# Altium PCB I2C ADC shield.PcbDoc
Units mil, origin at the board's own origin, x right, y up, seen from the top; angles counter-clockwise.
Board outline 3937.01 x 2755.91 mil, 2 copper layers (Top Layer, Bottom Layer); 18 components, 41 nets, 93 pads, 0 vias.
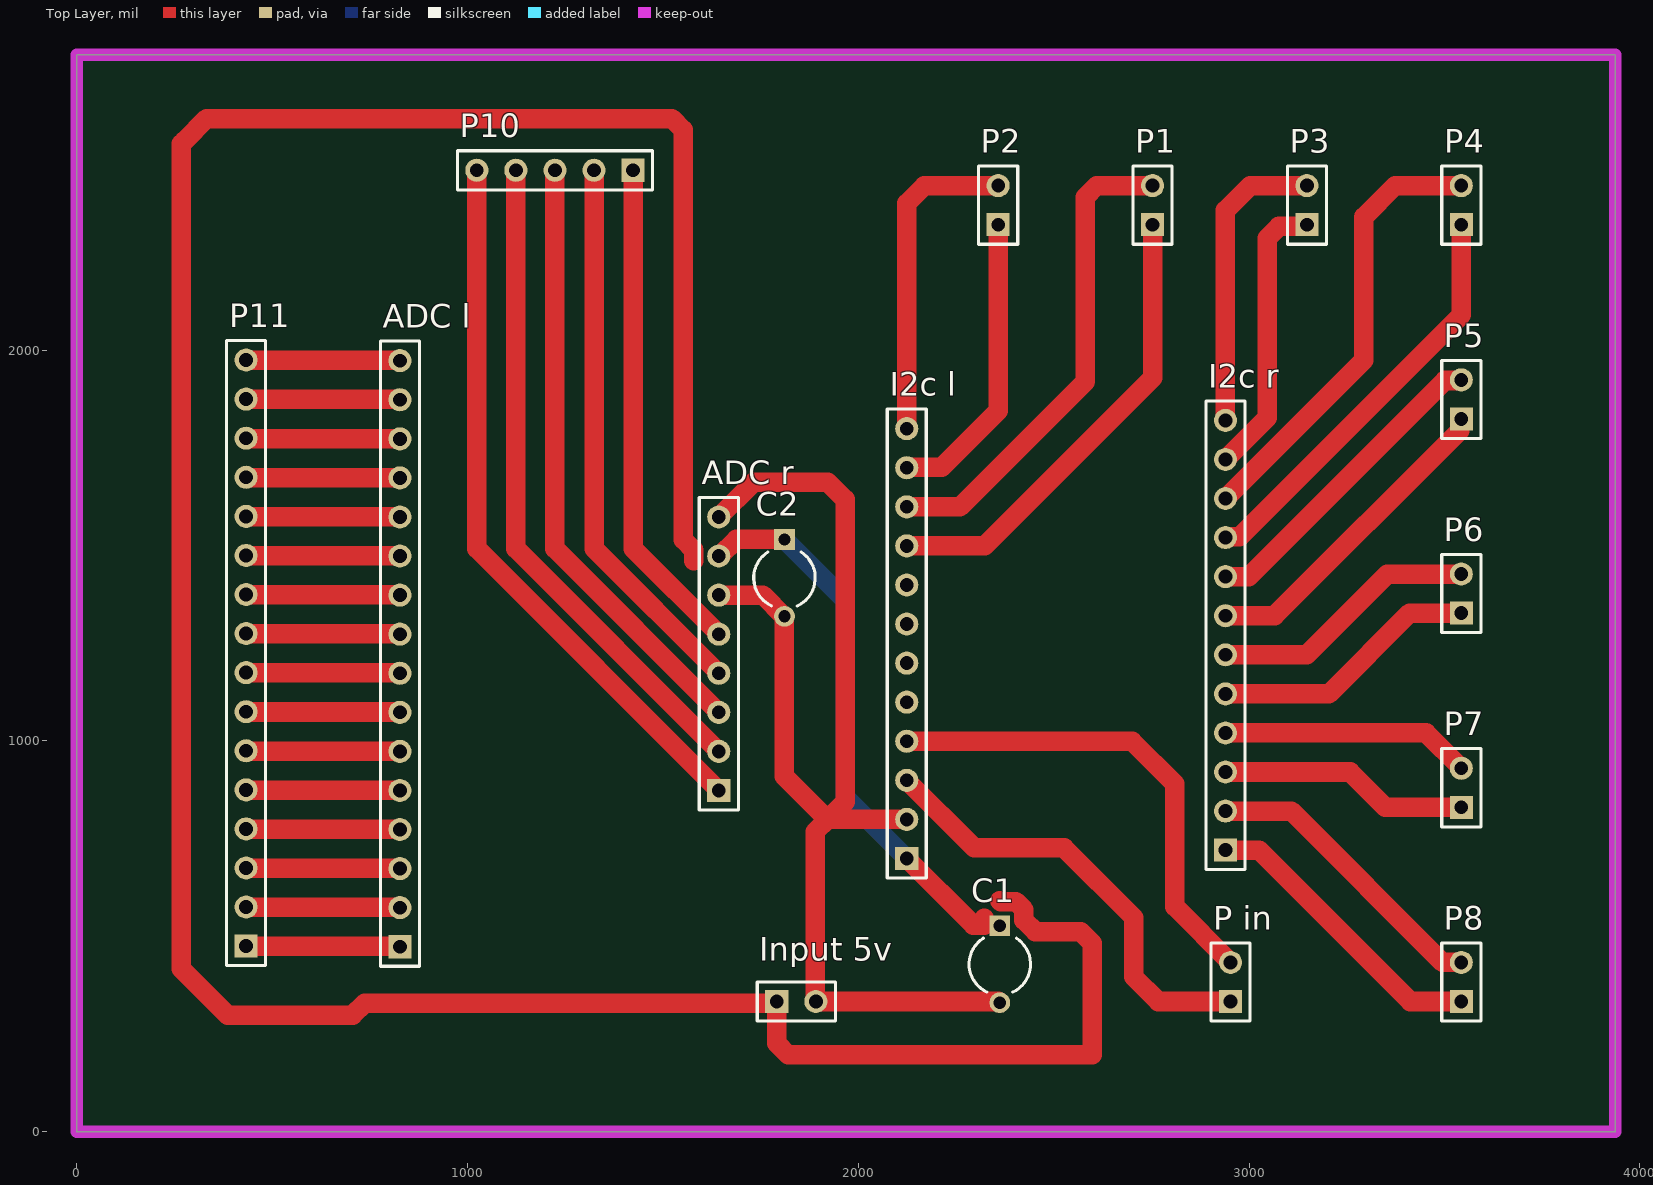
[diagram p0: Top Layer view]
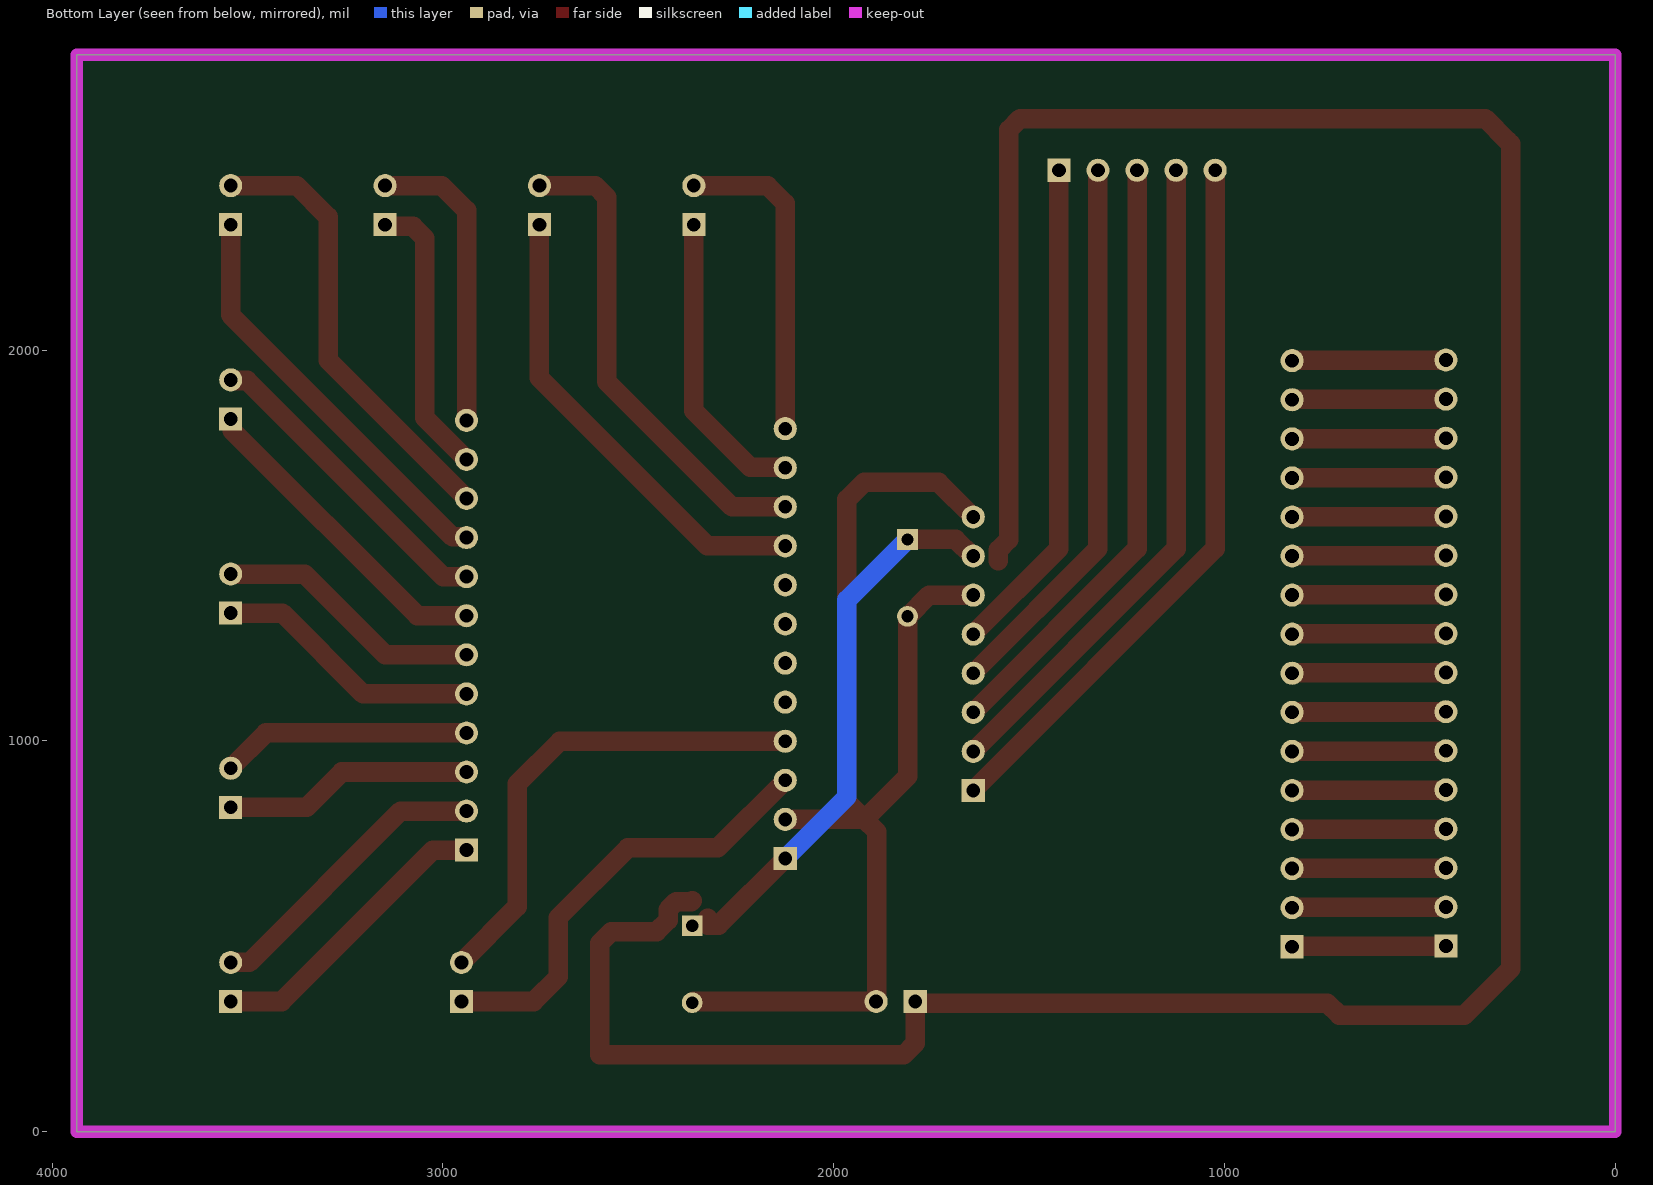
[diagram p1: Bottom Layer view, seen from below]

## Layer stack, top to bottom
Top Solder: solder mask 0.4, Solder Resist, Dk 3.5
Top Layer: signal copper 1.4
Dielectric 1: dielectric 12.6, FR-4, Dk 4.8
Bottom Layer: signal copper 1.4
Bottom Solder: solder mask 0.4, Solder Resist, Dk 3.5

## Board outline
0,0 0,2755.91 3937.01,2755.91 3937.01,0

## Design rules (kind name [scope] priority, off if disabled: settings)
Clearance [All] p1: gap=10 ignorepadtopadclearanceinfootprint=FALSE except(0: Arc-Hole Track-Hole SMDPad-Hole THPad-Hole Via-Hole Fill-Hole Poly-Hole Region-Hole Text-Hole)
PolygonConnect [All] p1: connectstyle=Relief reliefconductorwidth=10 reliefentries=4 polygonreliefangle="90 Angle" airgapwidth=10
RoomDefinition Designator [InComponentClass('Designator')] p1: confinementstyle=ConfineIn formatcopy=TRUE lockcomponents=FALSE outline 50,39 3897.64,39 3897.64,2716.54 50,2716.54
RoutingVias [All] p1: holewidth=28 width=50 viastyle="Through Hole" minholewidth=28 minwidth=50 maxholewidth=28 maxwidth=50
SolderMaskExpansion [All] p1: expansion=4 istentingtop=FALSE
Width [All] p1: maxlimit=150 minlimit=30 preferedwidth=100
30 further rules are at their usual default settings.

## Classes and differential pairs
component class Designator: "ADC l" "ADC r" C2 "I2c l" "I2c r" "Input 5v" P1 P2 P3 P4 P5 P6 P7 P8 P10 P11 "P in"

## Components (designator, comment, footprint, x,y, rotation, side; value= is the part's Value field where it differs from the comment)
"ADC l" "ADC left" HDR1X16 826.77,473.23 r90 top
"ADC r" "ADC right" HDR1X8 1642.86,873.23 r90 top
C1 "Cap2" CAPR5-4X5 2362.2,428.54 r270 top value=100nf
C2 "Cap2" CAPR5-4X5 1811.02,1417.32 r270 top value=100nf
"I2c l" "I2c left" HDR1X12 2123.98,699.21 r90 top
"I2c r" "I2c right" HDR1X12 2939.76,720.47 r90 top
"Input 5v" "Header 2" HDR1X2#1 1791.34,333.07 r0 top
P1 "C1" HDR1X2#2 2753.1,2321.26 r90 top
P2 "C2" HDR1X2#2 2358,2321.26 r90 top
P3 "C3" HDR1X2#2 3148.2,2321.26 r90 top
P4 "C4" HDR1X2#2 3543.31,2321.26 r90 top
P5 "C5" HDR1X2#2 3543.31,1824.21 r90 top
P6 "C6" HDR1X2#2 3543.31,1327.17 r90 top
P7 "C7" HDR1X2#2 3543.31,830.12 r90 top
P8 "C8" HDR1X2#2 3543.31,333.07 r90 top
P10 "Header 5" HDR1X5 1423.62,2460.63 r180 top
P11 "Header 16" HDR1X16 433.07,474.8 r90 top
"P in" "Input SDA SCA" HDR1X2#2 2952.76,333.07 r90 top

## Footprints (in the part's own frame and the unit in brackets; to place one, negate y for a bottom-side part, rotate by r counter-clockwise, add the part's x,y. Pads: shape width x height; smd on the part's side, far side on the other; paste and mask are expansions set on the pad)
CAPR5-4X5 [mm] "Capacitor; 2 Leads"
  rect 1.35x1.35 hole 0.8: 1(-2.5,0)
  round 1.35 hole 0.8: 2(2.5,0)
  silkscreen extent -1.69,-2 1.82,2
HDR1X2#1 [mm] "Connector; Header; 2 Position"
  round 1.5 hole 0.9: 2(2.54,0)
  rect 1.5x1.5 hole 0.9: " "(0,0)
  silkscreen extent -1.27,-1.27 3.81,1.27
HDR1X2#2 [mm] "Connector; Header; 2 Position"
  rect 1.5x1.5 hole 0.9: 1(0,0)
  round 1.5 hole 0.9: 2(2.54,0)
  silkscreen extent -1.27,-1.27 3.81,1.27
HDR1X5 [mm] "Connector; Header; 5 Position"
  rect 1.5x1.5 hole 0.9: 1(0,0)
  round 1.5 hole 0.9: 2(2.54,0) 3(5.08,0) 4(7.62,0) 5(10.16,0)
  silkscreen extent -1.27,-1.27 11.43,1.27
HDR1X8 [mm] "Connector; Header; 8 Position"
  rect 1.5x1.5 hole 0.9: 1(0,0)
  round 1.5 hole 0.9: 2(2.54,0) 3(5.08,0) 4(7.62,0) 5(10.16,0) 6(12.7,0) 7(15.24,0) 8(17.78,0)
  silkscreen extent -1.27,-1.27 19.05,1.27
HDR1X12 [mm] "Connector; Header; 12 Position"
  rect 1.5x1.5 hole 0.9: 1(0,0)
  round 1.5 hole 0.9: 2(2.54,0) 3(5.08,0) 4(7.62,0) 5(10.16,0) 6(12.7,0) 7(15.24,0) 8(17.78,0) 9(20.32,0) 10(22.86,0) 11(25.4,0) 12(27.94,0)
  silkscreen extent -1.27,-1.27 29.21,1.27
HDR1X16 [mm] "Connector; Header; 16 Position"
  rect 1.5x1.5 hole 0.9: 1(0,0)
  round 1.5 hole 0.9: 2(2.54,0) 3(5.08,0) 4(7.62,0) 5(10.16,0) 6(12.7,0) 7(15.24,0) 8(17.78,0) 9(20.32,0) 10(22.86,0) 11(25.4,0) 12(27.94,0) 13(30.48,0) 14(33.02,0) 15(35.56,0) 16(38.1,0)
  silkscreen extent -1.27,-1.27 39.37,1.27

## Part data
"ADC l": library part "Header 16", "Header, 16-Pin", LatestRevisionDate=17-Jul-2002, LatestRevisionNote="Re-released for DXP Platform.", Publisher="Altium Limited"
"ADC r": library part "Header 8", "Header, 8-Pin", LatestRevisionDate=17-Jul-2002, LatestRevisionNote="Re-released for DXP Platform.", Publisher="Altium Limited"
C1 C2: "Capacitor", PackageDescription="Capacitor; 2 Leads", PackageReference=CAPR5-4X5, Published=23-Sep-2002, Publisher="Altium Limited"
"I2c l" "I2c r": library part "Header 12", "Header, 12-Pin", LatestRevisionDate=17-Jul-2002, LatestRevisionNote="Re-released for DXP Platform.", Publisher="Altium Limited"
"Input 5v": "Header, 2-Pin", LatestRevisionDate=17-Jul-2002, LatestRevisionNote="Re-released for DXP Platform.", Publisher="Altium Limited"
P1 P2 P3 P4 P5 P6 P7 P8 "P in": library part "Header 2", "Header, 2-Pin", LatestRevisionDate=17-Jul-2002, LatestRevisionNote="Re-released for DXP Platform.", Publisher="Altium Limited"
P10: "Header, 5-Pin", LatestRevisionDate=17-Jul-2002, LatestRevisionNote="Re-released for DXP Platform.", Publisher="Altium Limited"
P11: "Header, 16-Pin", LatestRevisionDate=17-Jul-2002, LatestRevisionNote="Re-released for DXP Platform.", Publisher="Altium Limited"

## Nets (pads, with @x,y where several pads share a name; then routed paths per layer and width w, separated by ;. In a path a pad name is that pad's centre, name@x,y a point inside that pad or via, vN(x,y) a via of type N, cw(c..) or ccw(c..) an arc to the next point about the centre after c; other vN are vias at no path point)
+5: "ADC r.7" "I2c l.1" C1.1 C2.1 | length 1418
  Top Layer w50: 1642.86,1473.23 1645.31,1473.23 1687.83,1515.75 C2.1 ; 2123.98,699.21 2294.65,528.54 2321.79,528.54 2321.79,546.12
  Bottom Layer w50: C2.1 1966.03,1360.74 1966.03,857.17 2123.98,699.21
GND: "ADC r.6" "ADC r.8" "I2c l.2" "Input 5v.2" C1.2 C2.2 | length 3131
  Top Layer w50: 1641.13,1374.96 1642.86,1373.23 1755.84,1373.23 1810.17,1318.9 C2.2 1811.02,909.45 1921.26,799.21 ; 1641.13,1571.5 1642.86,1573.23 1731.63,1662 1922,1662 1966,1618 1966,843.95 1921.26,799.21 ; 2123.98,799.21 1921.26,799.21 ; C1.2 2361.35,330.12 2358.4,333.07 1891.34,333.07 1889.76,334.65 1889.76,767.72 1921.26,799.21
"NetADC l_1": "ADC l.1" P11.1 | length 394.4
  Top Layer w50: P11.1 433.86,474.02 825.98,474.02 826.77,473.23
"NetADC l_2": "ADC l.2" P11.2 | length 394.4
  Top Layer w50: P11.2 433.86,574.02 825.98,574.02 826.77,573.23
"NetADC l_3": "ADC l.3" P11.3 | length 394.4
  Top Layer w50: P11.3 433.86,674.02 825.98,674.02 826.77,673.23
"NetADC l_4": "ADC l.4" P11.4 | length 394.4
  Top Layer w50: P11.4 433.86,774.02 825.98,774.02 826.77,773.23
"NetADC l_5": "ADC l.5" P11.5 | length 394.4
  Top Layer w50: P11.5 433.86,874.02 825.98,874.02 826.77,873.23
"NetADC l_6": "ADC l.6" P11.6 | length 394.4
  Top Layer w50: P11.6 433.86,974.02 825.98,974.02 826.77,973.23
"NetADC l_7": "ADC l.7" P11.7 | length 394.4
  Top Layer w50: P11.7 433.86,1074.02 825.98,1074.02 826.77,1073.23
"NetADC l_8": "ADC l.8" P11.8 | length 394.4
  Top Layer w50: P11.8 433.86,1174.02 825.98,1174.02 826.77,1173.23
"NetADC l_9": "ADC l.9" P11.9 | length 394.4
  Top Layer w50: P11.9 433.86,1274.02 825.98,1274.02 826.77,1273.23
"NetADC l_10": "ADC l.10" P11.10 | length 394.4
  Top Layer w50: P11.10 433.86,1374.02 825.98,1374.02 826.77,1373.23
"NetADC l_11": "ADC l.11" P11.11 | length 394.4
  Top Layer w50: P11.11 433.86,1474.02 825.98,1474.02 826.77,1473.23
"NetADC l_12": "ADC l.12" P11.12 | length 394.4
  Top Layer w50: P11.12 433.86,1574.02 825.98,1574.02 826.77,1573.23
"NetADC l_13": "ADC l.13" P11.13 | length 394.4
  Top Layer w50: P11.13 433.86,1674.02 825.98,1674.02 826.77,1673.23
"NetADC l_14": "ADC l.14" P11.14 | length 394.4
  Top Layer w50: P11.14 433.86,1774.02 825.98,1774.02 826.77,1773.23
"NetADC l_15": "ADC l.15" P11.15 | length 394.4
  Top Layer w50: P11.15 433.86,1874.02 825.98,1874.02 826.77,1873.23
"NetADC l_16": "ADC l.16" P11.16 | length 394.4
  Top Layer w50: P11.16 433.86,1974.02 825.98,1974.02 826.77,1973.23
"NetADC r_1": "ADC r.1" P10.5 | length 1843.9
  Top Layer w50: P10.5 1023.62,1492.46 1642.86,873.23
"NetADC r_2": "ADC r.2" P10.4 | length 1702.5
  Top Layer w50: P10.4 1123.62,1492.46 1642.86,973.23
"NetADC r_3": "ADC r.3" P10.3 | length 1561.1
  Top Layer w50: P10.3 1223.62,1492.46 1642.86,1073.23
"NetADC r_4": "ADC r.4" P10.2 | length 1419.6
  Top Layer w50: P10.2 1323.62,1492.46 1642.86,1173.23
"NetADC r_5": "ADC r.5" P10.1 | length 1278.2
  Top Layer w50: P10.1 1423.62,1492.46 1642.86,1273.23
"NetI2c l_3": "I2c l.3" "P in.1" | length 1152.1
  Top Layer w50: 2123.98,899.21 2296.96,726.24 2526.76,726.24 2705,548 2705,396.29 2768.22,333.07 2952.76,333.07
"NetI2c l_4": "I2c l.4" "P in.2" | length 1247.3
  Top Layer w50: 2123.98,999.21 2700.79,999.21 2810,890 2810,575.83 2952.76,433.07
"NetI2c l_9": "I2c l.9" P1.1 | length 1199.3
  Top Layer w50: 2123.98,1499.21 2323.21,1499.21 2753.1,1929.1 P1.1
"NetI2c l_10": "I2c l.10" P1.2 | length 1246.1
  Top Layer w50: 2123.98,1599.21 2260.21,1599.21 2581,1920 2581,2391.97 2610.29,2421.26 P1.2
"NetI2c l_11": "I2c l.11" P2.1 | length 770.7
  Top Layer w50: 2123.98,1699.21 2125.72,1700.95 2213.95,1700.95 2358,1845 P2.1
"NetI2c l_12": "I2c l.12" P2.2 | length 829.5
  Top Layer w50: 2123.98,1799.21 2123.98,2375.98 2169,2421 2357.74,2421 P2.2
"NetI2c r_1": "I2c r.1" P8.1 | length 764
  Top Layer w50: 2939.76,720.47 3025.53,720.47 3412.93,333.07 P8.1
"NetI2c r_2": "I2c r.2" P8.2 | length 764
  Top Layer w50: 2939.76,820.47 3108.53,820.47 3495.71,433.29 3543.08,433.29 P8.2
"NetI2c r_3": "I2c r.3" P7.1 | length 641
  Top Layer w50: 2939.76,920.47 3258.53,920.47 3348.88,830.12 P7.1
"NetI2c r_4": "I2c r.4" P7.2 | length 641
  Top Layer w50: 2939.76,1020.47 3452.95,1020.47 P7.2
"NetI2c r_5": "I2c r.5" P6.1 | length 689.2
  Top Layer w50: 2939.76,1120.47 3204.47,1120.47 3411.17,1327.17 P6.1
"NetI2c r_6": "I2c r.6" P6.2 | length 689.2
  Top Layer w50: 2939.76,1220.47 3147.47,1220.47 3354.17,1427.17 P6.2
"NetI2c r_7": "I2c r.7" P5.1 | length 827.5
  Top Layer w50: 2939.76,1320.47 3065.64,1320.47 3538.78,1793.61 3538.78,1819.68 P5.1
"NetI2c r_8": "I2c r.8" P5.2 | length 812.2
  Top Layer w50: 2939.76,1420.47 2999.47,1420.47 3501.48,1922.48 3541.57,1922.48 P5.2
"NetI2c r_9": "I2c r.9" P4.1 | length 1070.5
  Top Layer w50: 2939.76,1520.47 2941.49,1522.2 2975.2,1522.2 3543.31,2090.31 P4.1
"NetI2c r_10": "I2c r.10" P4.2 | length 1149.8
  Top Layer w50: 2939.76,1620.47 3294,1974.72 3294,2341 3374.26,2421.26 P4.2
"NetI2c r_11": "I2c r.11" P3.1 | length 726.3
  Top Layer w50: 2939.76,1720.47 3047,1827.72 3047,2287 3076.73,2316.73 3143.68,2316.73 P3.1
"NetI2c r_12": "I2c r.12" P3.2 | length 772
  Top Layer w50: 2939.76,1820.47 2939.76,2357.76 3003.26,2421.26 P3.2
pads on no net: "I2c l.5" "I2c l.6" "I2c l.7" "I2c l.8" "Input 5v. "
copper on no net: | length 7645.4
  Top Layer w50: 1578.33,1461 1578.33,1488.67 1552,1515 1552,2563.71 1522.71,2593 332,2593 275,2536 267,2528 267,417 386,298 706,298 736.54,328.54 1786.81,328.54 1791.34,333.07 1791.34,226.14 1820.63,196.85 2598.43,196.85 2598.43,482.52 2569.14,511.81 2453.07,511.81 2423.78,541.1 2423.78,568.04 2403.28,588.54 2364.21,588.54 2362.2,590.55

## Keep-outs
Keep-Out Layer:
  the board outline again, w32